# Altium PCB VAMoS PCB.PcbDoc (part 1 of 2)
Units mm, origin at the board's own origin, x right, y up, seen from the top; angles counter-clockwise.
Board outline 104.39 x 129.79 mm, 4 copper layers (Top Layer, Ground Layer, Power Layer, Bottom Layer), stack 0.75 mm thick; 155 components, 106 nets, 508 pads, 201 vias.
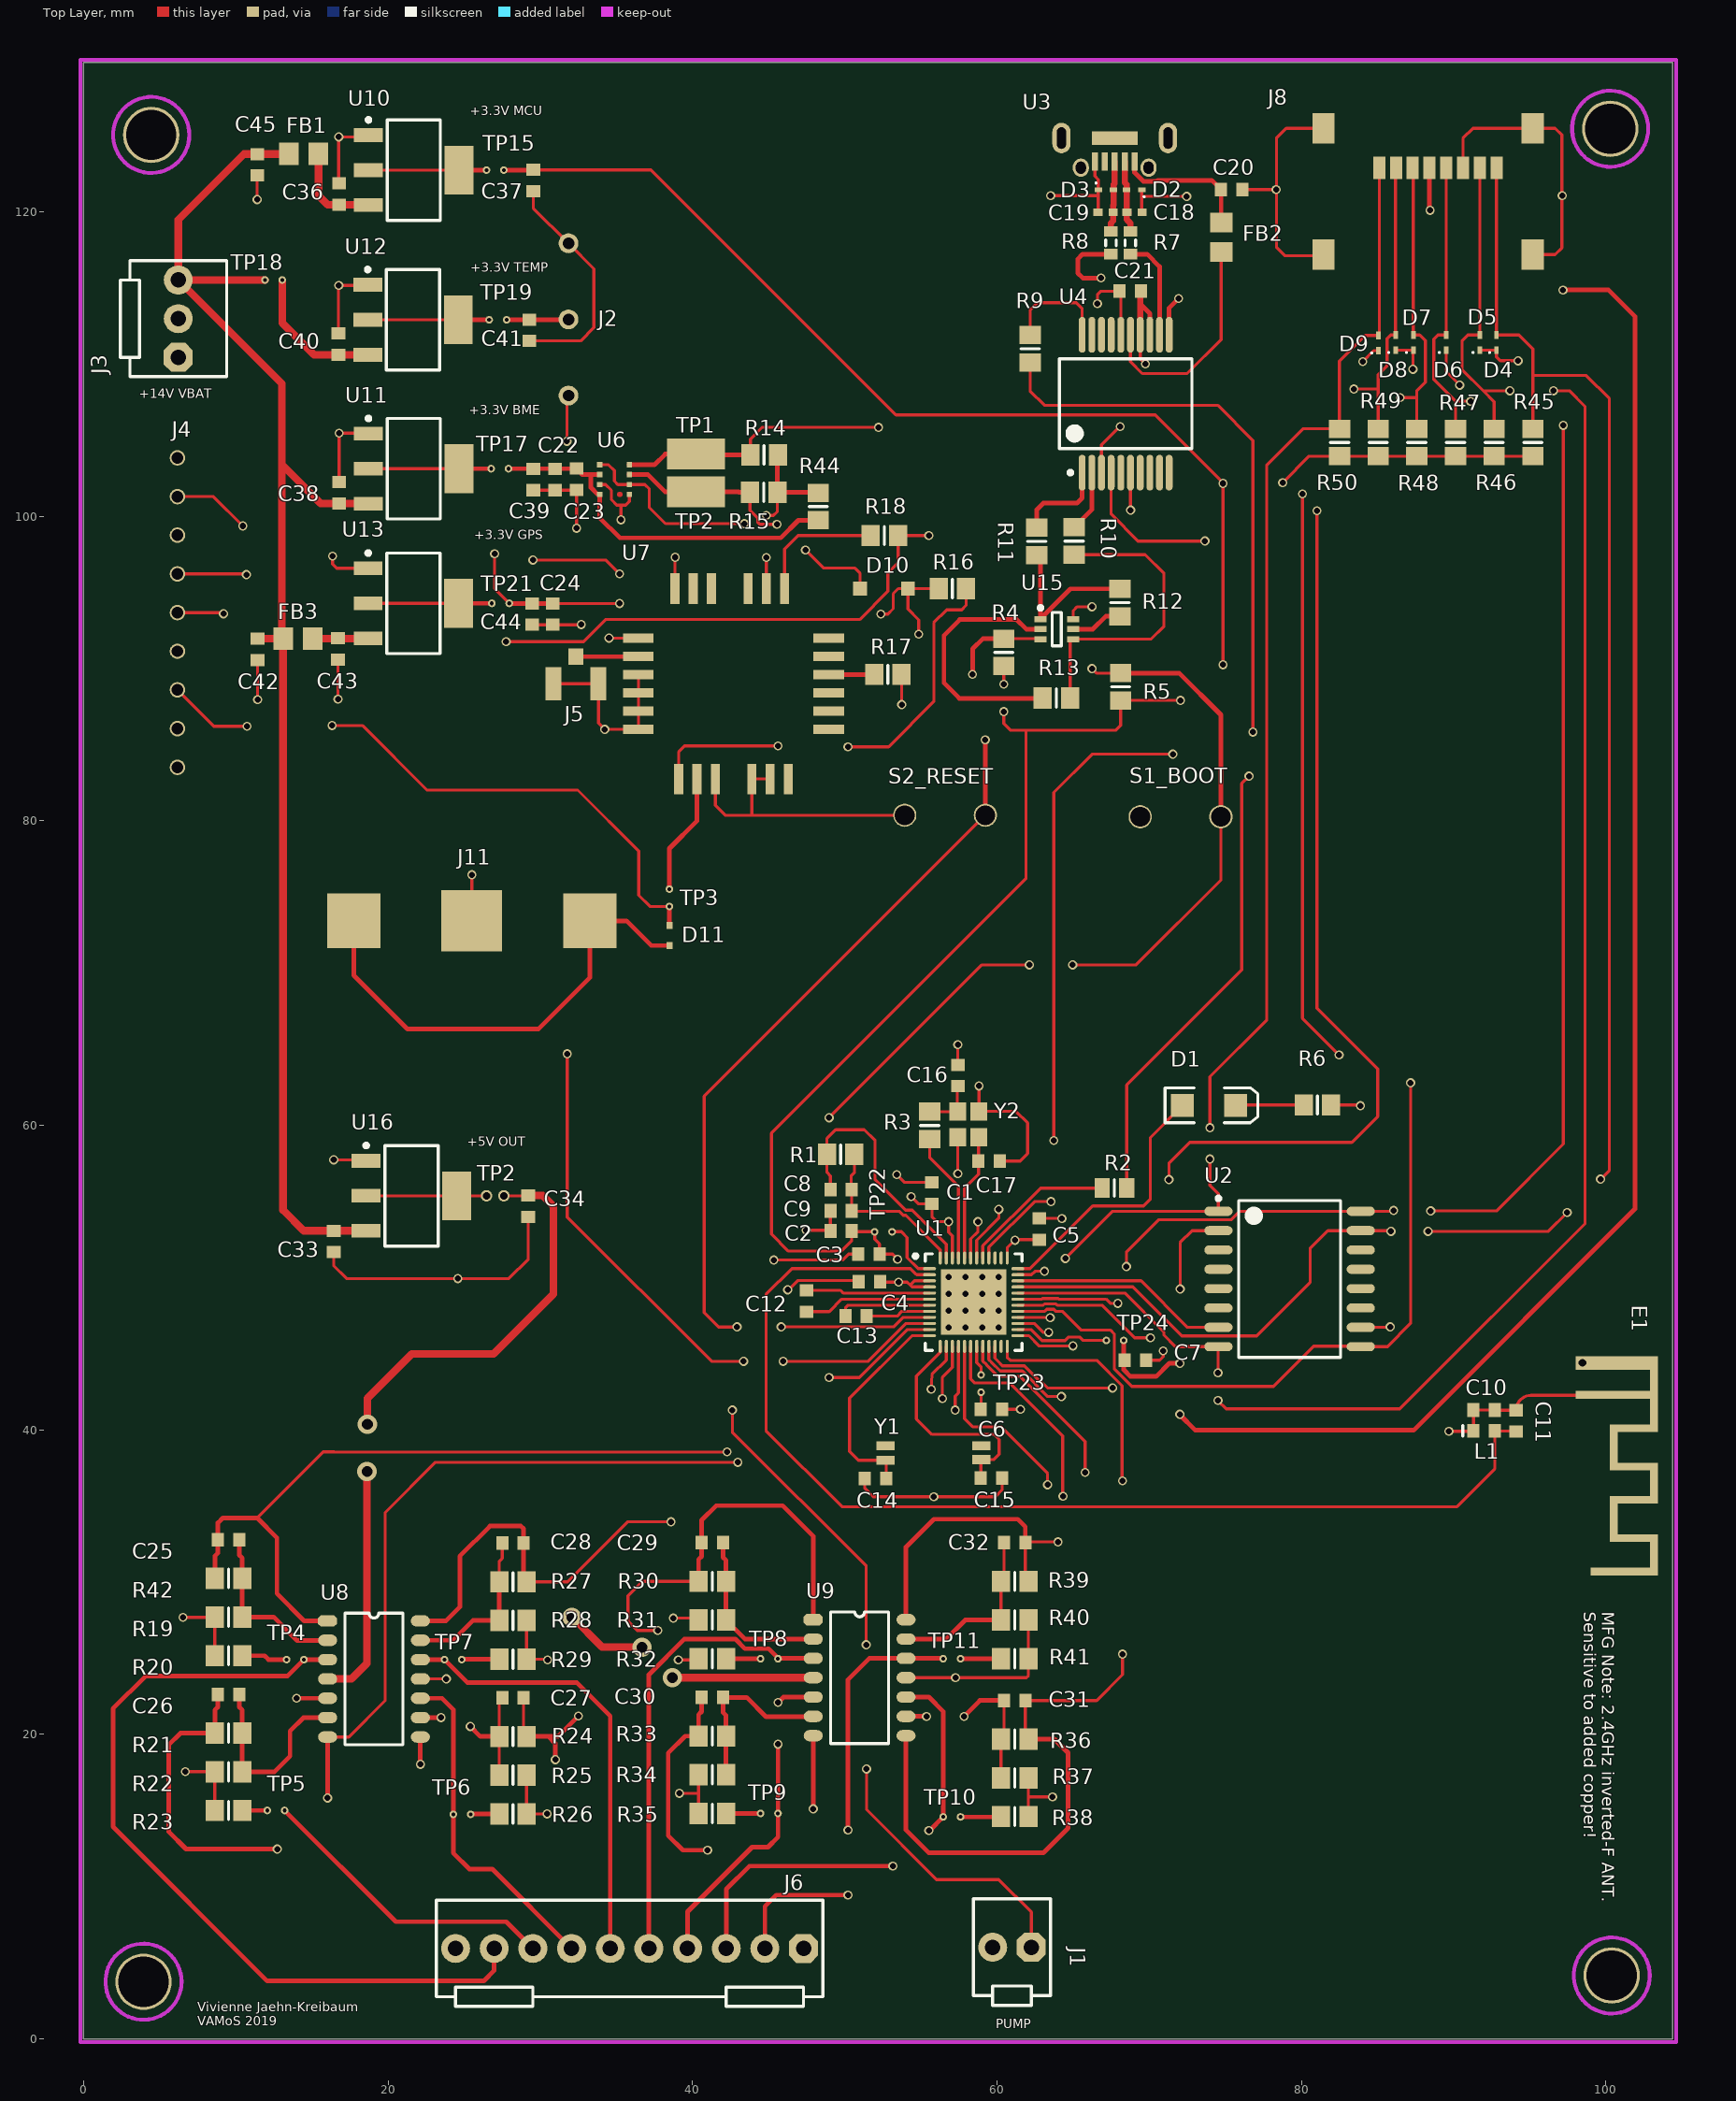
[diagram p0: Top Layer view]
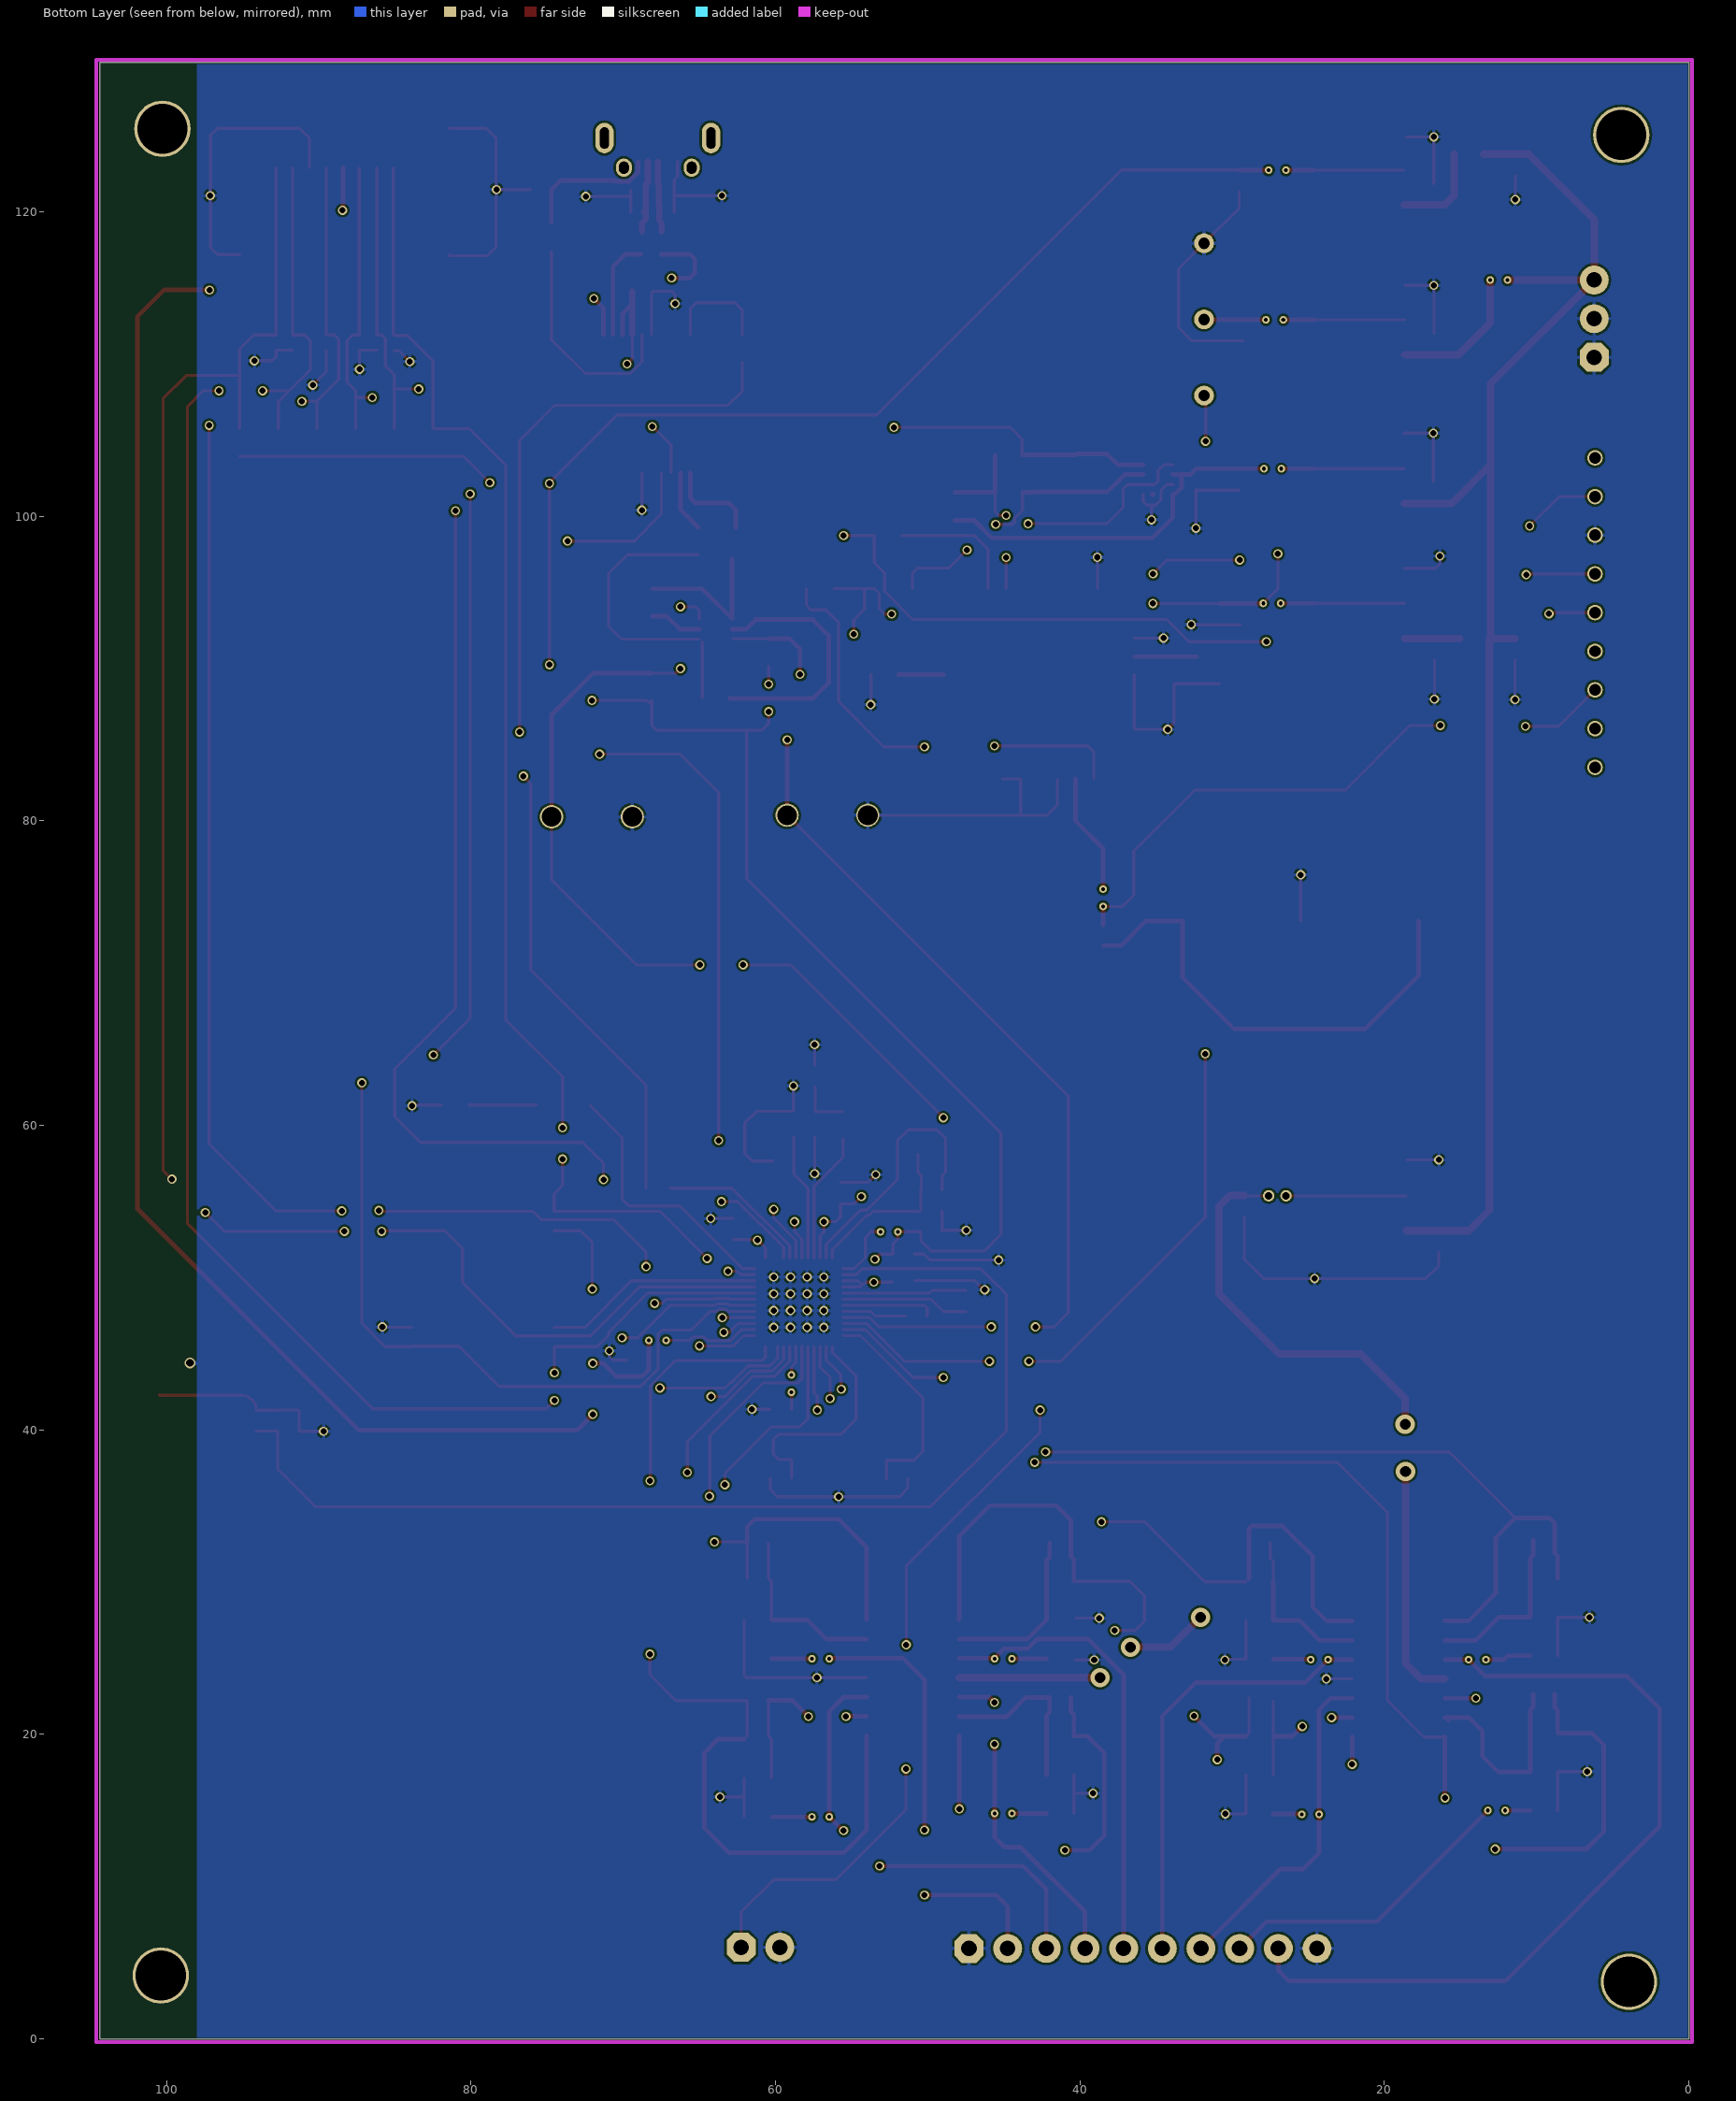
[diagram p1: Bottom Layer view, seen from below]
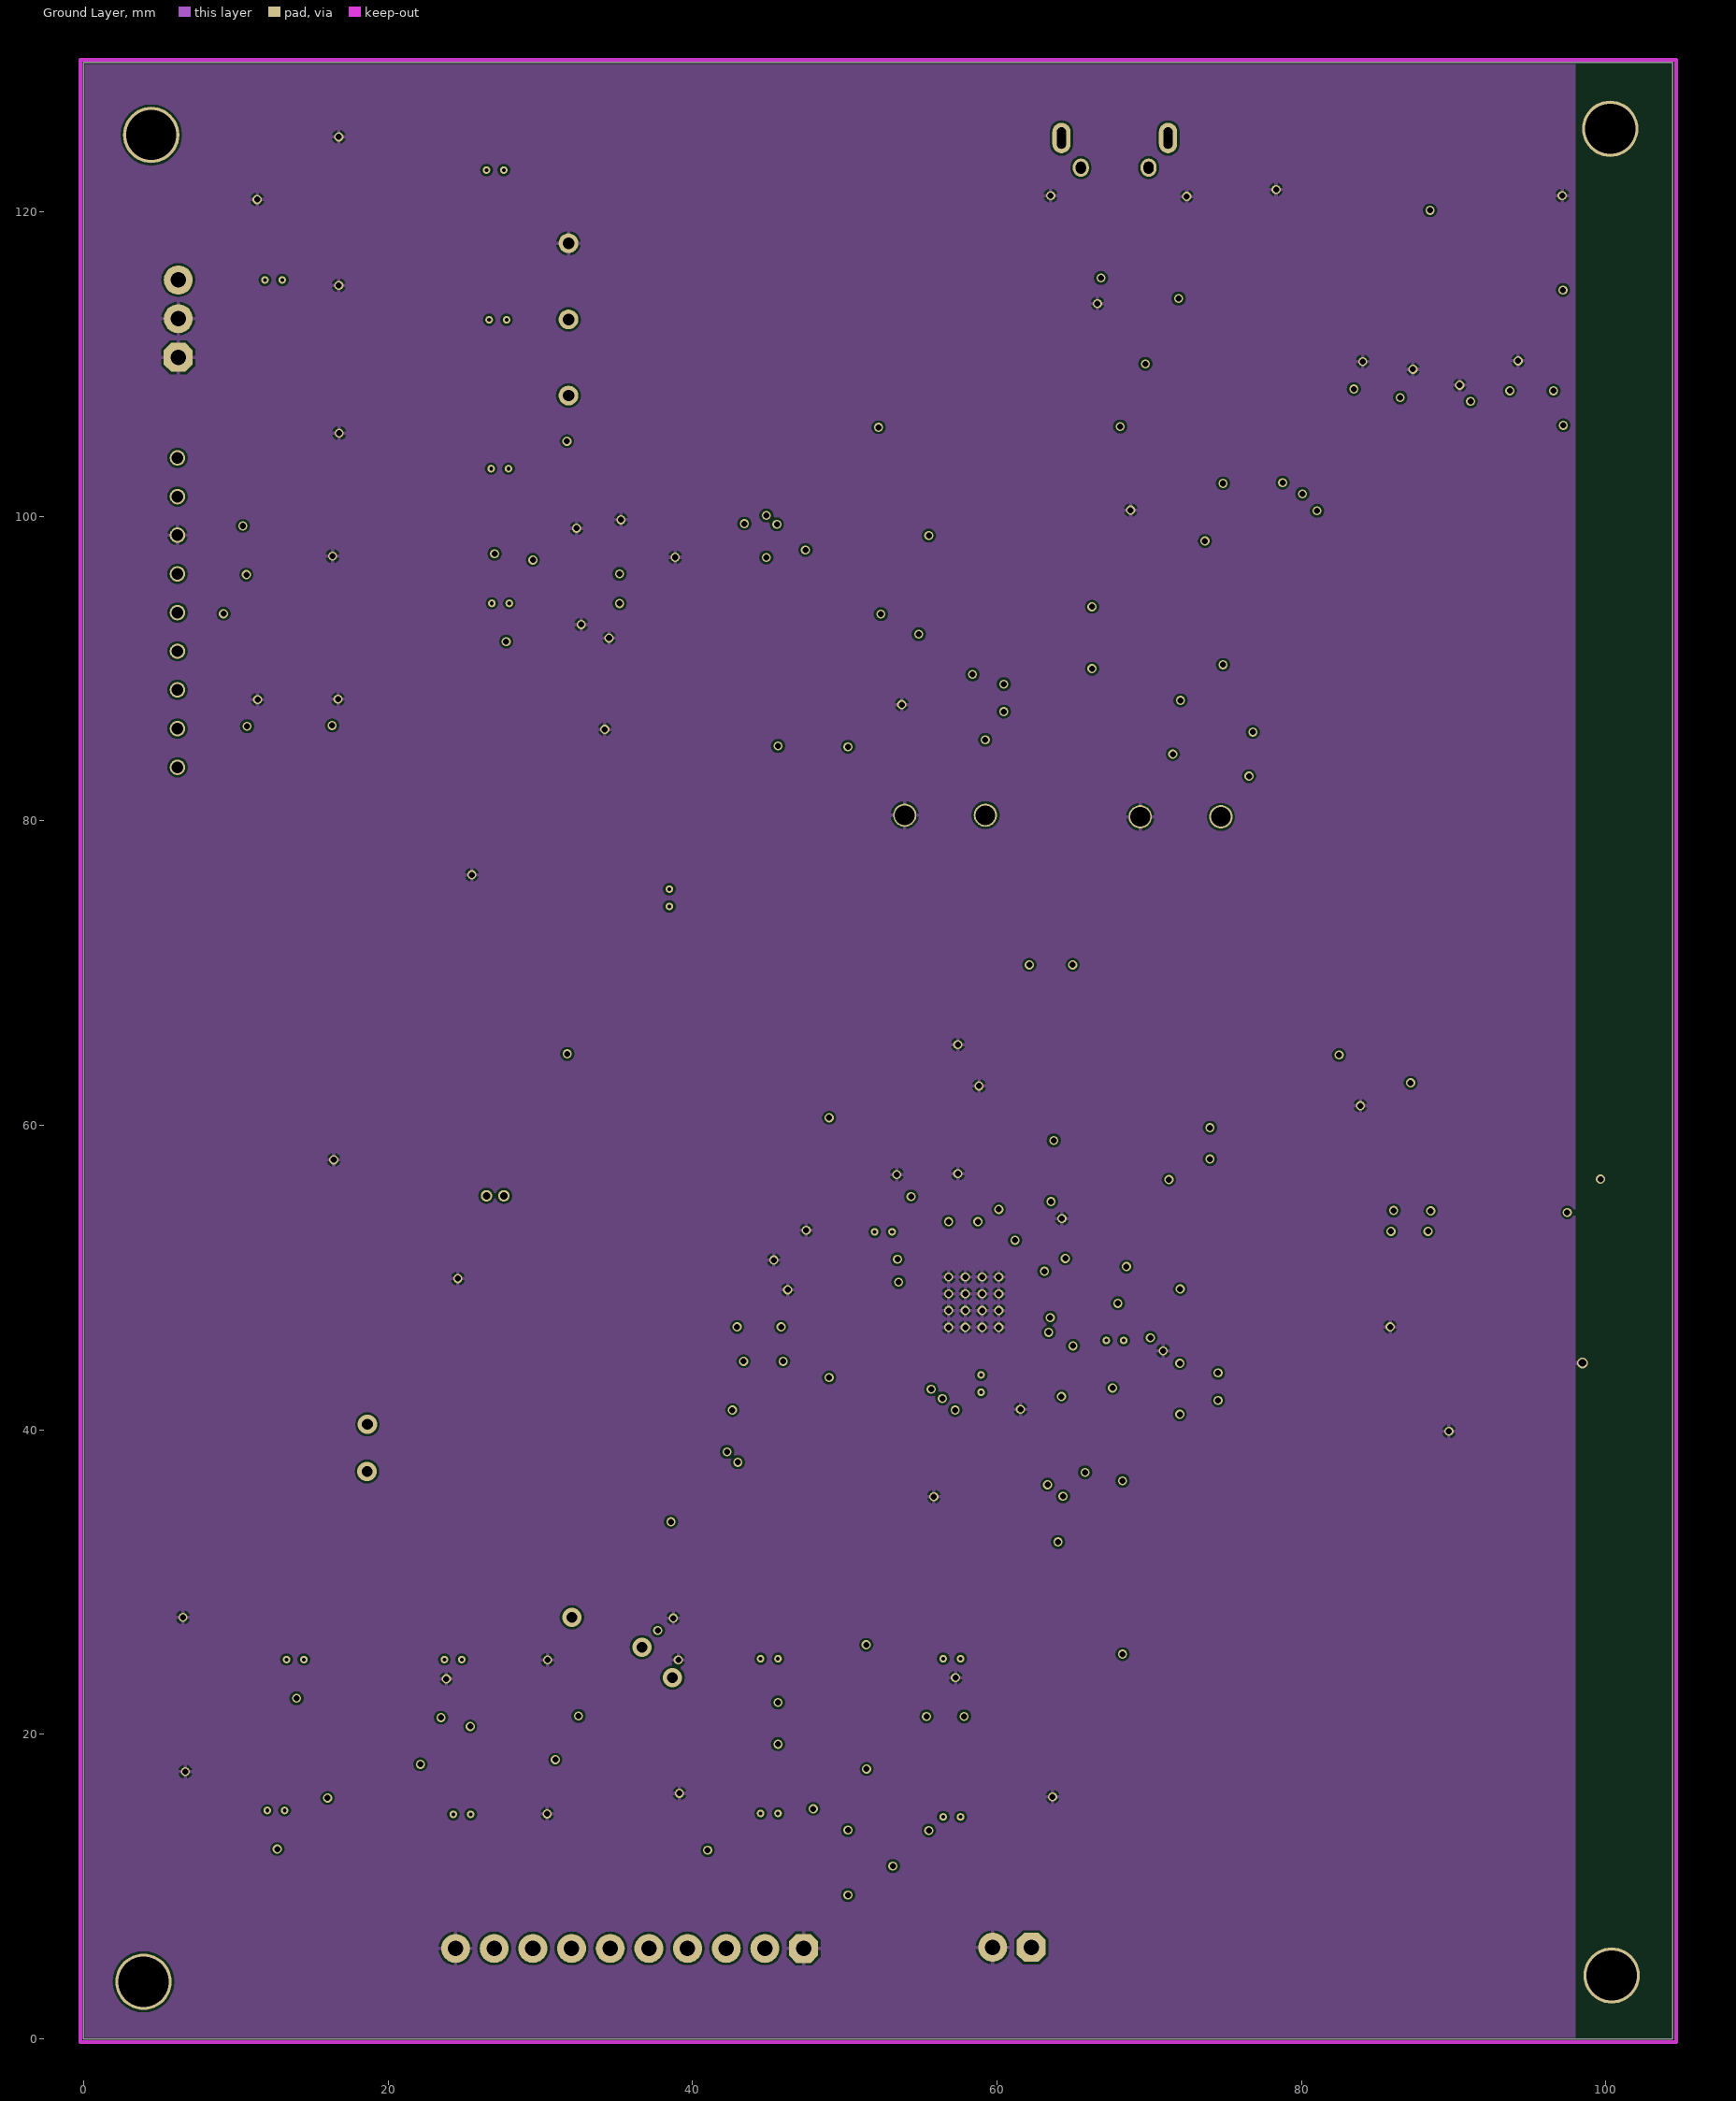
[diagram p2: Ground Layer]
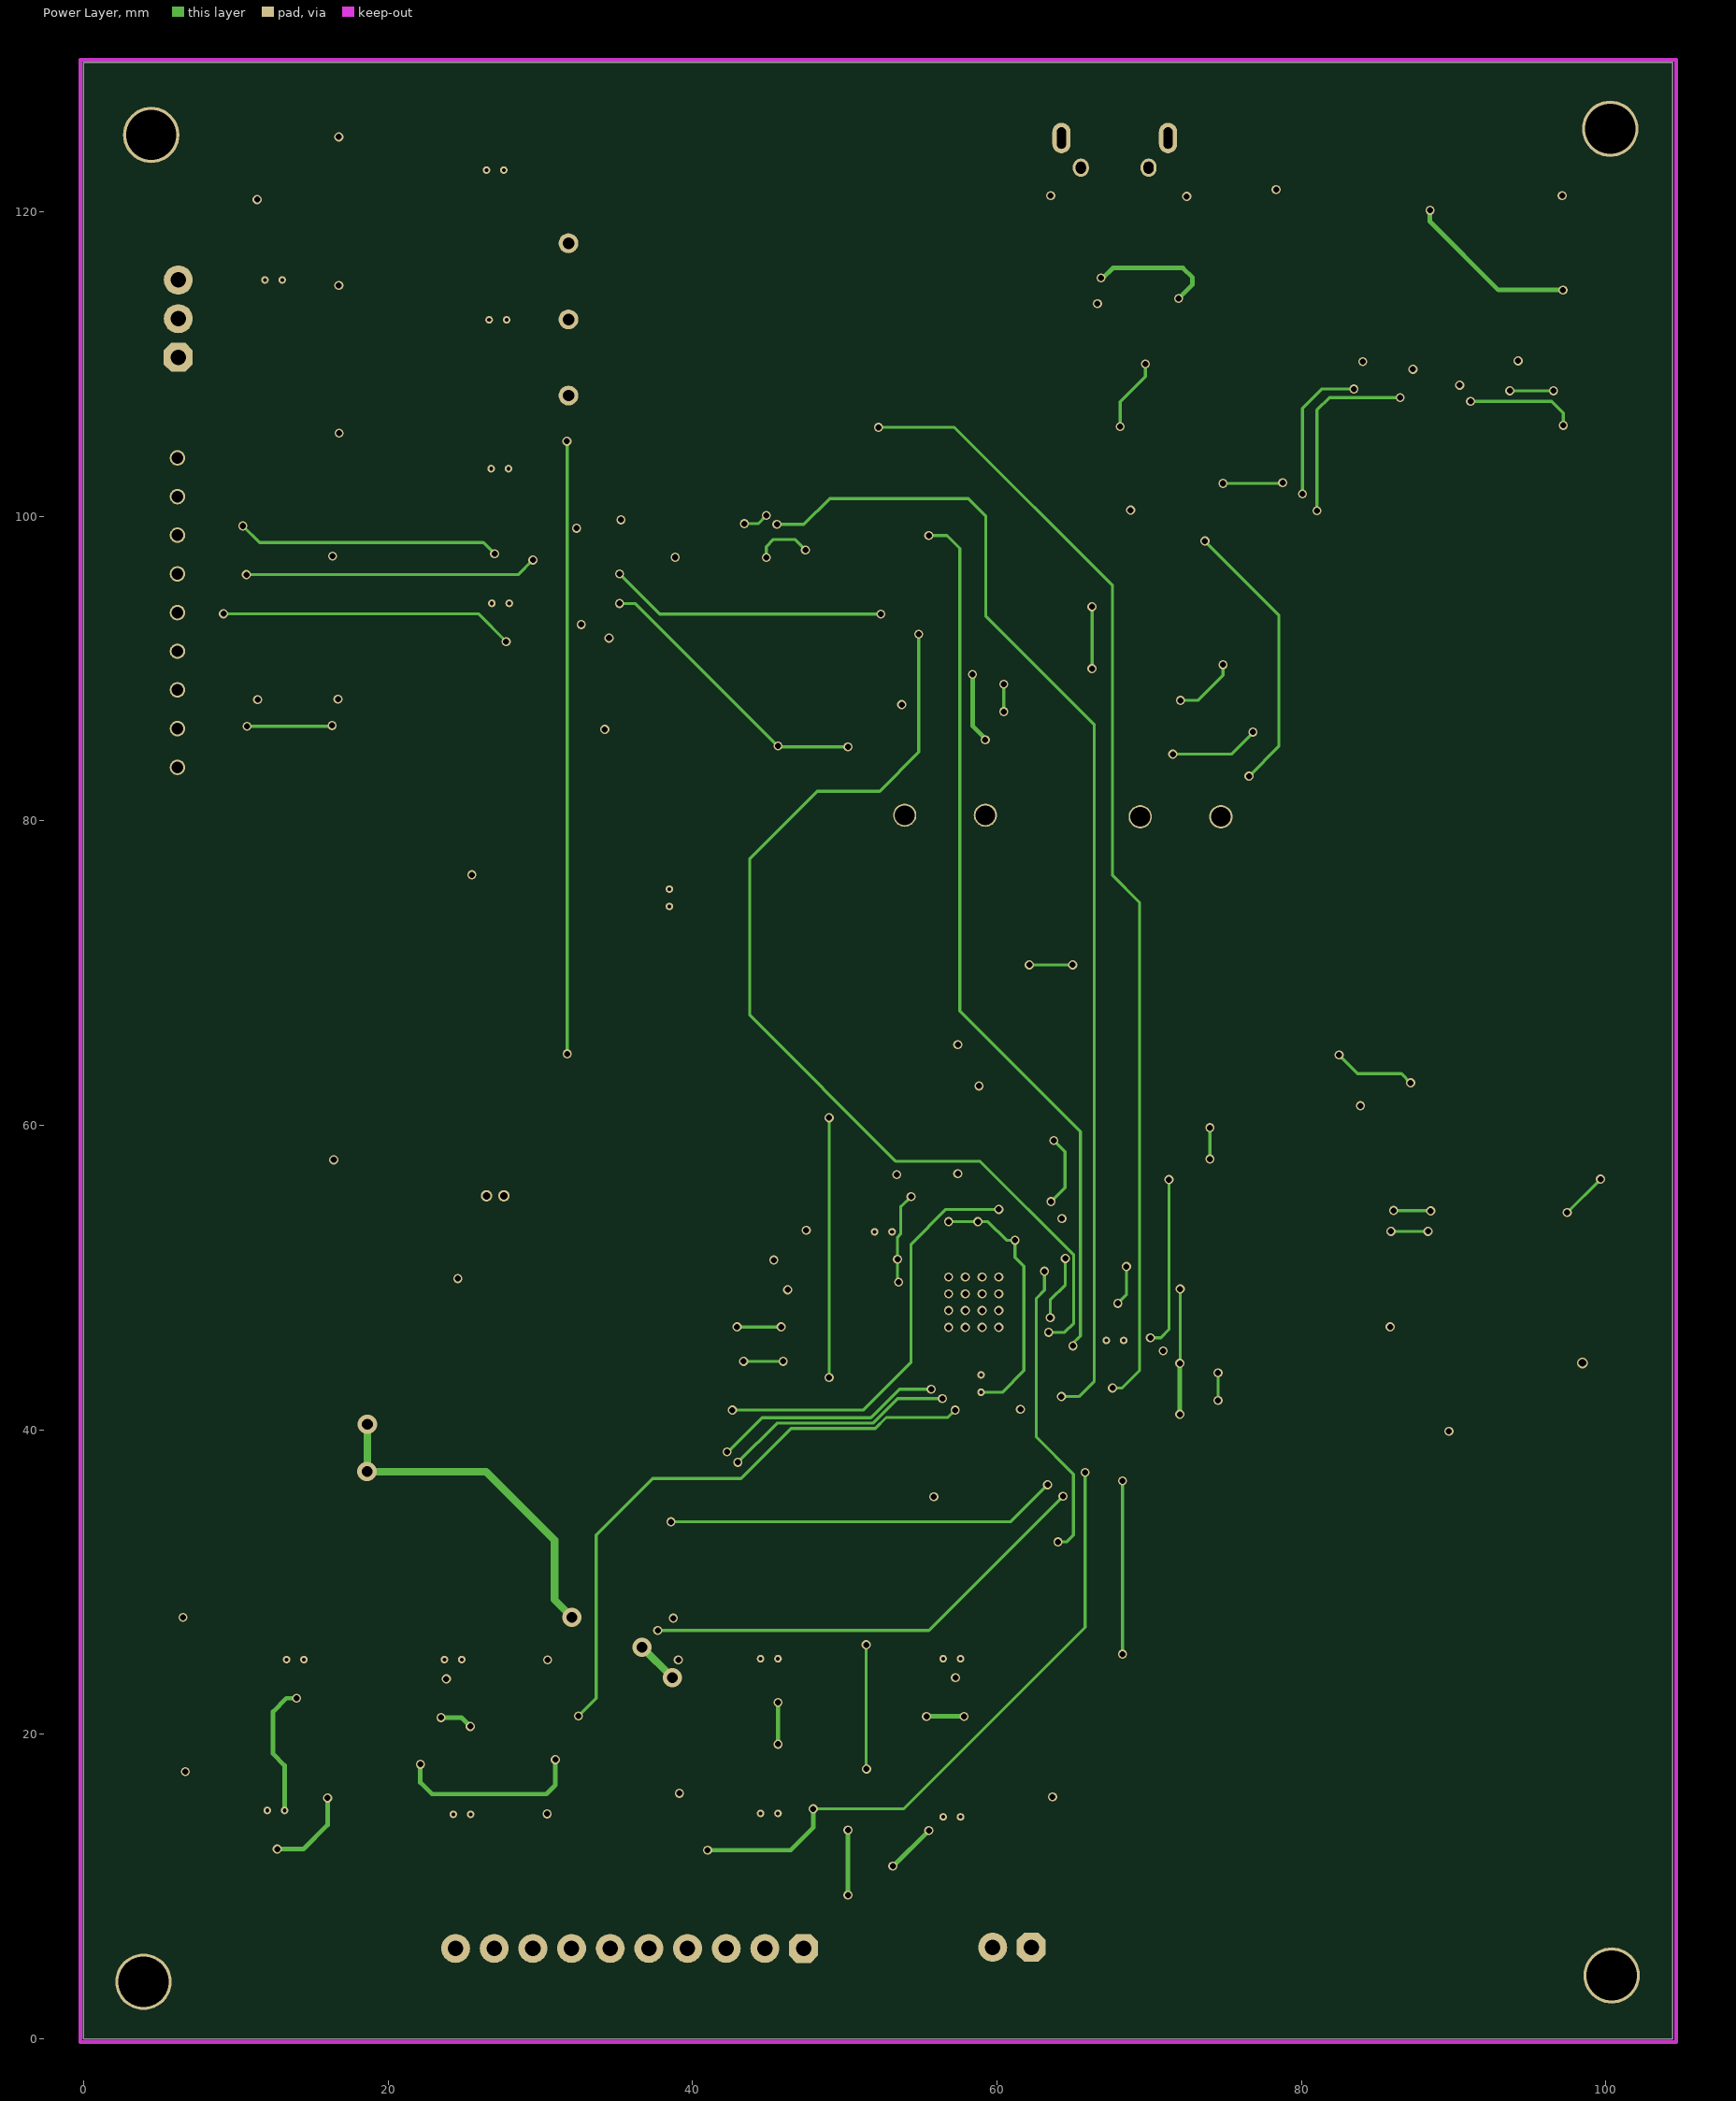
[diagram p3: Power Layer]

## Layer stack, top to bottom
Top Solder: solder mask 0.0102, Solder Resist, Dk 3.5
Top Layer: signal copper 0.035
Dielectric 1: core 0.2, FR-4, Dk 4.2
Ground Layer: signal copper 0.035
Dielectric 3: prepreg 0.21, Dk 4.2
Power Layer: signal copper 0.035
Dielectric 2: core 0.2, FR-4, Dk 4.2
Bottom Layer: signal copper 0.035
Bottom Solder: solder mask 0.0102, Solder Resist, Dk 3.5

## Board outline
0,0 101.6,0 104.394,0 104.394,129.794 0,129.794 0,120.65

## Design rules (kind name [scope] priority, off if disabled: settings)
Clearance [All] p1: gap=0.15
ComponentClearance [All] p1: gap=0.25 collisioncheckmode=3 verticalgap=0.25 showdistances=FALSE
DiffPairsRouting [All] p1: maxlimit=10 minlimit=0.2 mostfreqgap=0.25 toplayer_minwidth=0.2 toplayer_maxwidth=10 toplayer_prefwidth=0.25 midlayer1_minwidth=0.2 midlayer1_maxwidth=10 midlayer1_prefwidth=0.25 midlayer2_minwidth=0.2 midlayer2_maxwidth=10 midlayer2_prefwidth=0.25 bottomlayer_minwidth=0.2 bottomlayer_maxwidth=10 bottomlayer_prefwidth=0.25 maxuncoupledlength=12.7
Height [All] p1: minheight=0 maxheight=100 prefheight=0
HoleSize [All] p1: absolutevalues=TRUE maxlimit=12 minlimit=0.2 maxpercent=80.000 minpercent=20.000
HoleToHoleClearance [All] p1: gap=0.25 allowstackedmicrovias=TRUE
MinimumSolderMaskSliver [All] p1: minsoldermaskwidth=0.05
PlaneClearance [All] p1: clearance=0.5
PlaneConnect [All] p1: planeconnectstyle=Relief reliefexpansion=0.25 reliefentries=4 reliefconductorwidth=0.25 reliefairgap=0.25
PolygonConnect [All] p1: connectstyle=Relief reliefconductorwidth=0.25 reliefentries=4 polygonreliefangle="90 Angle" airgapwidth=0.15
RoutingCorners [All] p1: cornerstyle=45-Degree minsetback=2.5 maxsetback=2.5
RoutingVias [All] p1: holewidth=0.4 width=0.6 viastyle="Through Hole" minholewidth=0.2 minwidth=0.5 maxholewidth=1 maxwidth=1.5
SilkToSilkClearance [All] p1: silktosilkclearance=0.25
SilkToSolderMaskClearance [IsPad] p1: minsilkscreentomaskgap=0.1 clearancetoexposedcopper=TRUE
SolderMaskExpansion [All] p1: expansion=0.1
Width [All] p1: maxlimit=10 minlimit=0.2 preferedwidth=0.3 minimp=50.000000 maximp=50.000000 favimp=50.000000
19 further rules are at their usual default settings.

## Classes and differential pairs
differential pair DIFF90: +DIFF90_P -DIFF90_N

## Components (designator, comment, footprint, x,y, rotation, side; value= is the part's Value field where it differs from the comment)
C1 "Cap" 1608[0603] 55.728,55.55 r270 top
C2 "Cap" 1608[0603] 49.759,53.061 r0 top
C3 "Cap" 1608[0603] 51.587,51.537 r0 top
C4 "Cap" 1608[0603] 51.613,49.733 r0 top
C5 "Cap" 1608[0603] 62.789,53.188 r270 top
C6 "Cap" 1608[0603] 59.639,41.351 r180 top
C7 "Cap" 1608[0603] 69.088,44.577 r180 top
C8 "Cap" 1608[0603] 49.759,55.778 r0 top
C9 "Cap" 1608[0603] 49.759,54.381 r0 top
C10 "Cap" 1608[0603] 91.999,41.3 r0 top
C11 "Cap" 1608[0603] 94.107,40.589 r90 top
C12 "Cap" 1608[0603] 47.498,48.463 r90 top
C13 "Cap" 1608[0603] 50.749,47.473 r0 top
C14 "Cap" 1608[0603] 52.019,36.805 r0 top
C15 "Cap" 1608[0603] 59.639,36.83 r180 top
C16 "Cap" 1608[0603] 57.429,63.271 r90 top
C17 "Cap" 1608[0603] 59.487,57.658 r0 top
C18 "Cap" 0402 69.037,119.964 r180 top
C19 "Cap" 0402 67.132,119.964 r0 top
C20 "Cap" 1608[0603] 75.413,121.463 r180 top
C21 "Cap" 1608[0603] 68.758,114.783 r0 top
C22 "Cap" 1608[0603] 30.963,102.413 r90 top
C23 "Cap" 1608[0603] 32.385,102.438 r90 top
C24 "Cap" 1608[0603] 30.81,93.574 r90 top
C25 "Cap" 1608[0603] 9.525,32.786 r180 top
C26 "Cap" 1608[0603] 9.525,22.626 r180 top
C27 "Cap" 1608[0603] 28.205,22.403 r0 top
C28 "Cap" 1608[0603] 28.205,32.563 r0 top
C29 "Cap" 1608[0603] 41.3,32.589 r180 top
C30 "Cap" 1608[0603] 41.3,22.429 r180 top
C31 "Cap" 1608[0603] 61.163,22.226 r0 top
C32 "Cap" 1608[0603] 61.163,32.589 r0 top
C33 "Cap" 1608[0603] 16.434,52.375 r90 top
C34 "Cap" 1608[0603] 29.21,54.686 r90 top
C36 "Cap" 1608[0603] 16.789,121.158 r270 top
C37 "Cap" 1608[0603] 29.54,122.047 r270 top
C38 "Cap" 1608[0603] 16.789,101.549 r270 top
C39 "Cap" 1608[0603] 29.54,102.413 r270 top
C40 "Cap" 1608[0603] 16.739,111.303 r270 top
C41 "Cap" 1608[0603] 29.286,112.217 r270 top
C42 "Cap" 1608[0603] 11.43,91.262 r90 top
C43 "Cap" 1608[0603] 16.713,91.288 r90 top
C44 "Cap" 1608[0603] 29.464,93.574 r90 top
C45 "Cap" 1608[0603] 11.405,123.088 r90 top
D1 "LED2" 3.2X1.6X1.1 73.939,61.316 r0 top
D2 "ESD7951ST5GOSCT-ND" SODFL100X40-2N 69.012,121.437 r180 top
D3 "ESD7951ST5GOSCT-ND" SODFL100X40-2N 67.158,121.437 r0 top
D4 "ESD7951ST5GOSCT-ND" SODFL100X40-2N 92.812,111.404 r90 top
D5 "ESD7951ST5GOSCT-ND" SODFL100X40-2N 91.719,111.404 r90 top
D6 "ESD7951ST5GOSCT-ND" SODFL100X40-2N 89.51,111.404 r90 top
D7 "ESD7951ST5GOSCT-ND" SODFL100X40-2N 87.351,111.404 r90 top
D8 "ESD7951ST5GOSCT-ND" SODFL100X40-2N 86.182,111.404 r90 top
D9 "ESD7951ST5GOSCT-ND" SODFL100X40-2N 85.065,111.379 r90 top
D10 "1N4148" "SOD-123 1N4148W-7-F" 52.578,95.25 r0 top
D11 "RB521S30T1G" "SOD-523 RB521S30" 38.481,72.466 r270 top
E1 "Antenna" SWRA1117 100.457,44.399 r270 top
FB1 "Ferrite Bead" MI0805K400R-10 13.487,123.8 r270 top
FB2 "Ferrite Bead" MI0805K400R-10 74.727,119.304 r180 top
FB3 "Ferrite Bead" MI0805K400R-10 13.106,91.973 r270 top
J1 "PUMP" 6410/2pin 62.255,6.02 r180 top
J2 "1935174" 1935174 31.852,112.928 r270 top
J3 "VBAT" 6410/3pin 6.223,110.439 r90 top
J4 "PPPC091LFBN-RC" PPPC091LFBN-RC 6.172,93.675 r90 top
J5 "uFl Connector" CONUFL001-SMD-T 32.334,89.256 r180 top
J6 "Header 10H" 6410/10pin 47.295,5.944 r180 top
J8 "microSD" SD-47219-001 88.411,122.885 r180 top
J11 "301 30mm Holder" S8201-46R 25.502,73.431 r0 top
L1 "Inductor" INDC1608L 91.999,39.929 r0 top
R1 "Res1" 6-0805_N 49.733,58.09 r180 top
R2 "Res1" 6-0805_L 67.716,55.88 r0 top
R3 "Res1" 6-0805_N 55.575,59.995 r90 top
R4 "Res1" 6-0805_N 60.452,91.059 r270 top
R5 "Res1" 6-0805_N 68.123,88.798 r270 top
R6 "Res1" 6-0805_N 81.051,61.341 r180 top
R7 "Res1" J1-0603 68.758,117.958 r270 top
R8 "Res1" J1-0603 67.488,117.958 r270 top
R9 "Res1" 6-0805_N 62.179,110.998 r270 top
R10 "Res1" 6-0805_N 65.075,98.374 r270 top
R11 "Res1" 6-0805_N 62.611,98.349 r270 top
R12 "Res1" 6-0805_N 68.072,94.336 r90 top
R13 "Res1" 6-0805_N 63.906,88.062 r180 top
R14 "Res1" 6-0805_N 44.704,104.038 r0 top
R15 "Res1" 6-0805_N 44.679,101.575 r0 top
R16 "Res1" 6-0805_N 57.074,95.25 r0 top
R17 "Res1" 6-0805_N 52.832,89.611 r180 top
R18 "Res1" 6-0805_N 52.603,98.73 r180 top
R19 "Res1" 6-0805_N 9.525,27.706 r0 top
R20 "Res1" 6-0805_N 9.525,25.166 r0 top
R21 "Res1" 6-0805_N 9.525,20.086 r180 top
R22 "Res1" 6-0805_N 9.525,17.546 r0 top
R23 "Res1" 6-0805_N 9.525,15.006 r0 top
R24 "Res1" 6-0805_N 28.205,19.863 r0 top
R25 "Res1" 6-0805_N 28.205,17.323 r180 top
R26 "Res1" 6-0805_N 28.205,14.783 r180 top
R27 "Res1" 6-0805_N 28.205,30.023 r0 top
R28 "Res1" 6-0805_N 28.205,27.483 r180 top
R29 "Res1" 6-0805_N 28.205,24.943 r180 top
R30 "Res1" 6-0805_N 41.3,30.049 r180 top
R31 "Res1" 6-0805_N 41.3,27.509 r0 top
R32 "Res1" 6-0805_N 41.3,24.969 r0 top
R33 "Res1" 6-0805_N 41.3,19.889 r180 top
R34 "Res1" 6-0805_N 41.3,17.349 r0 top
R35 "Res1" 6-0805_N 41.3,14.809 r0 top
R36 "Res1" 6-0805_N 61.163,19.686 r0 top
R37 "Res1" 6-0805_N 61.163,17.146 r180 top
R38 "Res1" 6-0805_N 61.163,14.606 r180 top
R39 "Res1" 6-0805_N 61.163,30.049 r0 top
R40 "Res1" 6-0805_N 61.163,27.509 r180 top
R41 "Res1" 6-0805_N 61.163,24.969 r180 top
R42 "Res1" 6-0805_N 9.525,30.246 r180 top
R44 "Res1" 6-0805_N 48.26,100.635 r270 top
R45 "Res1" 6-0805_N 95.199,104.845 r270 top
R46 "Res1" 6-0805_N 92.659,104.845 r270 top
R47 "Res1" 6-0805_N 90.119,104.845 r270 top
R48 "Res1" 6-0805_N 87.579,104.845 r270 top
R49 "Res1" 6-0805_N 85.039,104.845 r270 top
R50 "Res1" 6-0805_N 82.499,104.845 r270 top
S1_BOOT "BTN-0" GPTS203211B 72.06,80.264 r90 top (schematic designator S1)
S2_RESET "RESET" GPTS203211B 56.591,80.366 r90 top (schematic designator S2)
TP1 "SMD Compact Test Point" "5029 Test Point" 40.234,104.089 r0 top
TP2 "Hook Type Test Point" 36-500x-ND#1 26.467,55.372 r0 top
TP2 "SMD Compact Test Point" "5029 Test Point" 40.234,101.6 r0 top
TP3 "Hook Type Test Point" 36-500x-ND#2 38.481,75.514 r270 top
TP4 "Hook Type Test Point" 36-500x-ND#2 13.335,24.917 r0 top
TP5 "Hook Type Test Point" 36-500x-ND#2 12.065,15.006 r0 top
TP6 "Hook Type Test Point" 36-500x-ND#2 25.425,14.752 r180 top
TP7 "Hook Type Test Point" 36-500x-ND#2 24.841,24.917 r180 top
TP8 "Hook Type Test Point" 36-500x-ND#2 44.475,24.969 r0 top
TP9 "Hook Type Test Point" 36-500x-ND#2 44.475,14.809 r0 top
TP10 "Hook Type Test Point" 36-500x-ND#2 57.607,14.58 r180 top
TP11 "Hook Type Test Point" 36-500x-ND#2 57.607,24.969 r180 top
TP15 "Hook Type Test Point" 36-500x-ND#2 26.467,122.733 r0 top
TP17 "Hook Type Test Point" 36-500x-ND#2 26.772,103.124 r0 top
TP18 "Hook Type Test Point" 36-500x-ND#2 11.913,115.519 r0 top
TP19 "Hook Type Test Point" 36-500x-ND#2 26.645,112.903 r0 top
TP21 "Hook Type Test Point" 36-500x-ND#2 26.822,94.285 r0 top
TP22 "Hook Type Test Point" 36-500x-ND#2 51.968,53.01 r0 top
TP23 "Hook Type Test Point" 36-500x-ND#2 58.953,42.469 r90 top
TP24 "Hook Type Test Point" 36-500x-ND#2 67.183,45.872 r0 top
U1 "ESP32D0WDQ6" QFN40P600X600X90_HS-49N 58.471,48.387 r0 top
U2 "S25FL128S" SOIC127P1030X265-16N 79.223,49.911 r0 top
U3 "UJ2-MIBH2-4" UJ2-MIBH2-4-SMT 69.037,123.292 r270 top
U4 "FT231XS" SOP64P1030X175-20N 68.453,107.391 r90 top
U6 "BME280" LGA8C65P4X4_250X250X100 34.874,102.413 r270 top
U7 "XA1100" XA1100 42.697,89.002 r0 top
U8 "LM660" SOIC-14 19.075,23.642 r0 top
U9 "LM660" SOIC-14 50.978,23.724 r0 top
U10 "ZLDO1117" SOT230P700X165-4N 21.692,122.733 r0 top
U11 "ZLDO1117" SOT230P700X165-4N 21.692,103.124 r0 top
U12 "ZLDO1117" SOT230P700X165-4N 21.641,112.903 r0 top
U13 "ZLDO1117" SOT230P700X165-4N 21.666,94.285 r0 top
U15 "MBT3904DW1T1G" SOT65P210X110-6N 63.932,92.583 r0 top
U16 "ZLDO1117" SOT230P700X165-4N 21.539,55.372 r0 top
Y1 "MC-146 32.768KA-AC3" MC-146 55.829,38.506 r0 top
Y2 "FA-20H" FA-20H 58.115,60.071 r270 top

## Footprints (in the part's own frame and the unit in brackets; to place one, negate y for a bottom-side part, rotate by r counter-clockwise, add the part's x,y. Pads: shape width x height; smd on the part's side, far side on the other; paste and mask are expansions set on the pad)
3.2X1.6X1.1 [mm] "SMT LED; 2 Flat Leads"
  rect 1.5x1.5 smd: 1(-1.75,0) 2(1.75,0)
  silkscreen extent -2.9,-1.15 3.2,1.15
6-0805_L [mm] "Chip Resistor, Body 2.0x1.2mm, IPC High Density"
  rect 1x1.3 smd: 1(-0.8,0) 2(0.8,0)
  silkscreen extent 0,-0.55 0,0.55, body extent -1.07,-0.7 1.07,0.7, height 0.7
6-0805_N [mm] "Chip Resistor, Body 2.0x1.2mm, IPC Medium Density"
  rect 1.2x1.4 smd: 1(-0.9,0) 2(0.9,0)
  silkscreen extent 0,-0.6 0,0.6, body extent -1.07,-0.7 1.07,0.7, height 0.7
36-500x-ND#1 [mm] "Hook Type Test Point"
  round 0.75 hole 0.5: 1(0,0) 2(1.14,0)
36-500x-ND#2 [mm] "Hook Type Test Point"
  round 0.5 hole 0.25: 1(0,0) 2(1.14,0)
0402 [mm] "Chip Capacitor, Body 1.0x0.5mm, IPC High Density"
  rect 0.6x0.5 smd: 1(-0.5,0) 2(0.5,0)
  body extent -0.55,-0.3 0.55,0.3, height 1.3
1608[0603] [mm] "Chip Capacitor, Body 1.6x0.8mm, IPC High Density"
  rect 0.8x0.9 smd: 1(-0.7,0) 2(0.7,0)
  body extent -0.87,-0.48 0.87,0.48, height 1.3
"5029 Test Point" [mm] "Compact SM Test Point"
  rect 3.8x2.03 smd: 1(0,0)
6410/2pin [mil]
  oct 75x75 hole 40: 1(0,0)
  round 75 hole 40: 2(100,0)
  silkscreen extent -50,-125 150,150, body extent -50,-114 150,114, height 461
6410/3pin [mil] "3-pin Power Connector"
  oct 75x75 hole 40: 1(0,0)
  round 75 hole 40: 2(100,0) 3(200,0)
  silkscreen extent -50,-125 250,150, body extent -50,-114 250,114, height 461
6410/10pin [mil] "10-pin J4 Analog Input Connector"
  oct 75x75 hole 40: 1(0,0)
  round 75 hole 40: 2(100,0) 3(200,0) 4(300,0) 5(400,0) 6(500,0) 7(600,0) 8(700,0) 9(800,0) 10(900,0)
  silkscreen extent -50,-125 950,150, body extent -50,-114 950,114, height 461
1935174 [mm] "3-pin 5mm Terminal Block"
  round 1.3 hole 0.762: 1(-5,0) 2(0,0) 3(5,0)
CONUFL001-SMD-T [mm] "uFL Connector"
  rect 1.05x2.2 smd: GND(-1.475,0.25) GND(1.475,0.25)
  rect 1x1.05 smd: SIG(0,-1.525)
  body extent -1.5,-1.55 1.5,1.55, height 1.25
FA-20H [mm] "40MHz Crystal"
  rect 1.2x1.1 smd: 1(-0.85,-0.7) 2(0.85,-0.7) 3(0.85,0.7) 4(-0.85,0.7)
GPTS203211B [mm] "SPST Push Button Switch"
  round 1.524 hole 1.3: 1(0,2.65) 2(0,-2.65)
  body extent -13,-6.5 0,6.5, height 9.1
INDC1608L [mm] "Chip Inductor, Body 1.6x0.8mm, IPC High Density"
  rect 0.8x0.9 smd: 1(-0.7,0) 2(0.7,0)
  silkscreen extent -1.4,-0.35 -1.4,0.35, body extent -0.87,-0.48 0.87,0.48, height 0.55
J1-0603 [mm] "Chip Resistor, Body 1.6x0.8mm, IPC High Density"
  rect 0.7x0.9 smd: 1(-0.75,0) 2(0.75,0)
  silkscreen extent -0.2,-0.35 0.2,0.35, body extent -0.85,-0.48 0.85,0.48, height 0.9
LGA8C65P4X4_250X250X100 [mm] "LGA, 8-Leads, Body 2.50x2.50mmx1.00mm, Pitch 0.65mm"
  rect 0.35x0.35 smd: 1(0.975,0.975) 2(0.325,0.975) 3(-0.325,0.975) 4(-0.975,0.975) 5(-0.975,-0.975) 6(-0.325,-0.975) 7(0.325,-0.975) 8(0.975,-0.975)
  Top Layer circle w0.2: c0.975,0.35 r0.08
  body extent -1.25,-1.25 1.25,1.25, height 1
MC-146 [mm] "32.768 kHz Crystal"
  rect 1.2x0.6 smd: 1(-3.15,-0.5) 2(3.15,-0.45) 3(3.15,0.45) 4(-3.15,0.45)
MI0805K400R-10 [mm] "Ferrite Bead"
  rect 1.47x1.285 smd: 1(0,0) 2(0,1.945)
PPPC091LFBN-RC [mm] "9-pin 0.100\" Female Header"
  round 1.02 hole 0.762: 1(-10.16,0) 2(-7.62,0) 3(-5.08,0) 4(-2.54,0) 5(0,0) 6(2.54,0) 7(5.08,0) 8(7.62,0) 9(10.16,0)
  body extent -12,-1.25 12,1.25, height 8.5
QFN40P600X600X90_HS-49N [mm] "QFN, 48-Leads, Body 6.00x6.00mm, Pitch 0.40mm, Thermal Pad 4.30x4.30mm, IPC Medium Density"
  oval 0.85x0.2 smd: 1(-2.9,2.2) 2(-2.9,1.8) 3(-2.9,1.4) 4(-2.9,1) 5(-2.9,0.6) 6(-2.9,0.2) 7(-2.9,-0.2) 8(-2.9,-0.6) 9(-2.9,-1) 10(-2.9,-1.4) 11(-2.9,-1.8) 12(-2.9,-2.2) 25(2.9,-2.2) 26(2.9,-1.8) 27(2.9,-1.4) 28(2.9,-1) 29(2.9,-0.6) 30(2.9,-0.2) 31(2.9,0.2) 32(2.9,0.6) 33(2.9,1) 34(2.9,1.4) 35(2.9,1.8) 36(2.9,2.2)
  oval 0.2x0.85 smd: 13(-2.2,-2.9) 14(-1.8,-2.9) 15(-1.4,-2.9) 16(-1,-2.9) 17(-0.6,-2.9) 18(-0.2,-2.9) 19(0.2,-2.9) 20(0.6,-2.9) 21(1,-2.9) 22(1.4,-2.9) 23(1.8,-2.9) 24(2.2,-2.9) 37(2.2,2.9) 38(1.8,2.9) 39(1.4,2.9) 40(1,2.9) 41(0.6,2.9) 42(0.2,2.9) 43(-0.2,2.9) 44(-0.6,2.9) 45(-1,2.9) 46(-1.4,2.9) 47(-1.8,2.9) 48(-2.2,2.9)
  rect 4.3x4.3 smd: 49(0,0)
  silkscreen extent -3.95,-3.17 3.17,3.17, body extent -3.03,-3.03 3.03,3.03, height 0.9
S8201-46R [mm] "12.5mm Coin Cell Holder"
  rect 3.5x3.6 smd: 1(-7.75,0) 1(7.75,0)
  rect 4x4 smd: 2(0,0)
  Mechanical 15 keep-out circle w0.254: c0,0 r6
SD-47219-001 [mm] "Molex microSD Card Holder"
  rect 0.8x1.5 smd: 1(3.3,0) 2(2.2,0) 3(1.1,0) 4(0,0) 5(-1.1,0) 6(-2.2,0) 7(-3.3,0) 8(-4.4,0)
  rect 1.45x2 smd: 9(-6.78,-2.6) 10(-6.78,5.7) 11(6.97,5.7) 12(6.97,-2.6)
  body extent -7.05,-5.6 7.55,8.9, height 1.06
"SOD-123 1N4148W-7-F" [mm] "2-leads, Standard Diode"
  rect 0.9x0.95 smd: 1(-1.575,0) 2(1.575,0)
"SOD-523 RB521S30" [mm] "2-leads"
  rect 0.48x0.4 smd: 1(-0.66,0) 2(0.66,0)
SODFL100X40-2N [mm] "SODFL, 2-Leads, Body 0.60x1.00mm, IPC Medium Density"
  rect 0.5x0.3 smd: 1(-0.5,0) 2(0.5,0)
  silkscreen extent -0.7,0.4 -0.6,0.5, body extent -0.42,-0.33 0.43,0.33, height 0.4
SOIC127P1030X265-16N [mm] "SOIC, 16-Leads, Body 10.30x7.50mm, Pitch 1.27mm, IPC Medium Density"
  oval 1.85x0.6 smd: 1(-4.675,4.445) 2(-4.675,3.175) 3(-4.675,1.905) 4(-4.675,0.635) 5(-4.675,-0.635) 6(-4.675,-1.905) 7(-4.675,-3.175) 8(-4.675,-4.445) 9(4.675,-4.445) 10(4.675,-3.175) 11(4.675,-1.905) 12(4.675,-0.635) 13(4.675,0.635) 14(4.675,1.905) 15(4.675,3.175) 16(4.675,4.445)
  silkscreen extent -4.8,-5.15 3.35,5.42, body extent -5.15,-5.15 5.15,5.15, height 2.65
SOIC-14 [mm]
  oct 1.25x0.75 smd: 1(-3.048,3.81)
  oval 1.25x0.75 smd: 2(-3.048,2.54) 3(-3.048,1.27) 4(-3.048,0) 5(-3.048,-1.27) 6(-3.048,-2.54) 7(-3.048,-3.81) 8(3.048,-3.81) 9(3.048,-2.54) 10(3.048,-1.27) 11(3.048,0) 12(3.048,1.27) 13(3.048,2.54) 14(3.048,3.81)
  silkscreen extent -1.91,-4.32 1.91,4.32, body extent -3.17,-4.32 3.17,4.32, height 1.52
SOP64P1030X175-20N [mm] "SOP, 20-Leads, Body 8.65x3.90mm, Pitch 0.64mm, IPC Medium Density"
  oval 2.35x0.45 smd: 1(-4.525,2.857) 2(-4.525,2.222) 3(-4.525,1.587) 4(-4.525,0.952) 5(-4.525,0.317) 6(-4.525,-0.318) 7(-4.525,-0.953) 8(-4.525,-1.588) 9(-4.525,-2.223) 10(-4.525,-2.858) 11(4.525,-2.857) 12(4.525,-2.222) 13(4.525,-1.587) 14(4.525,-0.952) 15(4.525,-0.317) 16(4.525,0.318) 17(4.525,0.953) 18(4.525,1.588) 19(4.525,2.223) 20(4.525,2.858)
  silkscreen extent -4.65,-4.35 2.95,4.35, body extent -5.15,-4.35 5.15,4.35, height 1.75
SOT65P210X110-6N [mm] "SOT23, 6-Leads, Body 2.00x2.10mm, Pitch 0.65mm, IPC Medium Density"
  rect 0.8x0.4 smd: 1(-1.075,0.65) 2(-1.075,0) 3(-1.075,-0.65) 4(1.075,-0.65) 5(1.075,0) 6(1.075,0.65)
  silkscreen extent -1.2,-1.1 0.3,1.52, body extent -1.1,-1.1 1.1,1.1, height 1.1
SOT230P700X165-4N [mm] "SOT223, 4-Leads, Body 6.50x7.00mm (avg), Pitch 2.30mm, IPC Medium Density"
  rect 1.9x0.9 smd: 1(-2.975,2.3) 2(-2.975,0) 3(-2.975,-2.3)
  rect 1.9x3.2 smd: 2(2.975,0)
  silkscreen extent -3.1,-3.3 1.75,3.42, body extent -3.5,-3.27 3.5,3.27, height 1.65
SWRA1117 [mm]
  rect 0.9x4.9 smd: 1(0,0)
  rect 5x0.5 smd: 1(2.05,2.7)
  rect 0.5x4.9 smd: 1(2.1,0)
  rect 0.5x2.64 smd: 1(4.3,1.13) 1(6.8,1.13) 1(9,1.13) 1(11.5,1.13)
  rect 2x0.5 smd: 1(5.55,0.06) 1(10.25,0.06)
  rect 2.7x0.5 smd: 1(7.9,2.7) 1(12.6,2.7)
  rect 0.5x3.94 smd: 1(13.7,0.5)
UJ2-MIBH2-4-SMT [mm] "USB MICRO-B Jack"
  oval 2x1.2 hole 0.6 slot 1.4 at 0 deg: 0(-1.55,2.2) 0(-1.55,-4.8)
  oval 1.2x1.05 hole 0.65 slot 0.8 at 0 deg: 0(0.4,0.925) 0(0.4,-3.525)
  rect 1.2x0.4 smd: 1(0,0) 2(0,-0.65) 3(0,-1.3) 4(0,-1.95) 5(0,-2.6)
  rect 0.9x3 smd: 9(-1.55,-1.3)
  body extent -4.75,-5 0.55,2.5, height 0.81
XA1100 [mm] "GPS Module"
  rect 2x0.6 smd: 1(-6.25,3) 2(-6.25,1.8) 3(-6.25,0.6) 4(-6.25,-0.6) 5(-6.25,-1.8) 6(-6.25,-3) 13(6.25,-3) 14(6.25,-1.8) 15(6.25,-0.6) 16(6.25,0.6) 17(6.25,1.8) 18(6.25,3)
  rect 0.6x2 smd: 7(-3.6,-6.25) 8(-2.4,-6.25) 9(-1.2,-6.25) 10(1.2,-6.25) 11(2.4,-6.25) 12(3.6,-6.25) 19(3.35,6.25) 20(2.15,6.25) 21(0.95,6.25) 22(-1.45,6.25) 23(-2.65,6.25) 24(-3.85,6.25)
  body extent -6.25,-6.25 6.25,6.25, height 7

## Part data
C1 C2 C3 C4 C5 C6 C7 C8 C9 C10 C11 C12 C13 C14 C15 C16 C17 C18 C19 C20 C21 C22 C23 C24 C25 C26 C27 C28 C29 C30 C31 C32 C33 C34 C36 C37 C38 C39 C40 C41 C42 C43 C44 C45: "Capacitor"
D1: "Typical RED, GREEN, YELLOW, AMBER GaAs LED"
D2 D3 D4 D5 D6 D7 D8 D9: library part ESD7951S, "TVS Diode"
D10: library part "Diode 1N4148", "High Conductance Fast Diode"
D11: library part "RB521S30T1G Shottky Diode", "RB521S30T1G Shottky Diode"
E1: "Generic Antenna"
FB1 FB2 FB3: "MI0805K400R-10"
J1: library part CON2, "Connector 2 pin"
J2: "3-pin Terminal Block"
J3: library part CON3, "Connector 3 pin"
J4: library part CON9, "9-pin 0.100\" Female Header"
J5: "CONUFL001-SMD-T"
J6: "Header, 10-Pin, Right Angle"
J8: library part CON12
J11: library part "Coin Cell Holder", "301 30mm Coin Cell Holder"
R1 R2 R3 R4 R5 R6 R7 R8 R9 R10 R11 R12 R13 R14 R15 R16 R17 R18 R19 R20 R21 R22 R23 R24 R25 R26 R27 R28 R29 R30 R31 R32 R33 R34 R35 R36 R37 R38 R39 R40 R41 R42 R44 R45 R46 R47 R48 R49 R50: "Resistor"
S1_BOOT S2_RESET: library part SW-PB, "Switch"
U1: library part ESP32, "Microcontroller"
U2: "QSPI 128M Flash Memory"
U3: library part "USB Shield"
U4: "USB-UART Interface"
U6: "Digital Environmental Sensor"
U7: "GPS Module"
U8 U9: "Quad opamplifiers"
U10 U11 U12 U13 U16: "Linear Regulator 1A"
U15: library part MBT3904DW1, "Dual NPN Transistors"
Y1: "32.768 kHz Crystal"
Y2: library part Y1, "40MHz Crystal Oscillator"

## Free pads (board coordinates)
  round 3.7 hole 3.3: 0(3.937,3.759) 0(4.445,125.044) 0(100.279,125.451) 0(100.381,4.166)

## Via types
v1: diameter 0.6, hole 0.4, Top Layer to Bottom Layer, 195 vias
v2: diameter 1.27, hole 0.711, Top Layer to Bottom Layer, 5 vias
v3: diameter 0.7, hole 0.5, Top Layer to Bottom Layer, 1 vias

## Nets (pads, with @x,y where several pads share a name; then routed paths per layer and width w, separated by ;. In a path a pad name is that pad's centre, name@x,y a point inside that pad or via, vN(x,y) a via of type N, cw(c..) or ccw(c..) an arc to the next point about the centre after c; other vN are vias at no path point)
32K_XN: C15.2 U1.13 Y1.2 | length 14.9
  Top Layer w0.2: U1.13@56.271,45.487 56.271,45.095 54.712,43.536 54.712,40.716 55.728,39.7 59.817,39.7 60.147,39.37 60.147,38.405 59.799,38.056 Y1.2@58.979,38.056 ; C15.2@58.939,36.83 Y1.2@58.939,38.016
32K_XP: C14.2 U1.12 Y1.1 | length 14.2
  Top Layer w0.2: Y1.1@52.679,38.006 50.894,38.006 50.317,38.583 50.317,42.088 54.417,46.187 U1.12@55.571,46.187 ; C14.2@52.719,36.805 Y1.1@52.719,37.966
+3.3V_BME: C22.2 C23.2 C39.1 R44.2 TP17.2 U6.6 U6.8 | length 24.7
  Top Layer w0.3: TP17.2@27.912,103.124 32.371,103.124 32.757,102.738 33.328,102.738 ; U6.6@33.899,102.738 33.328,102.738 ; R44.2@48.26,99.735 46.954,99.735 45.801,98.582 35.231,98.582 33.899,99.914 U6.8@33.899,101.438 33.775,101.438 33.328,101.885 33.328,102.738
+3.3V_GPS: C24.2 C44.2 J4.8 R16.2 TP21.2 U7.7 | length 76.3
  Top Layer w0.2: J4.8@6.172,101.295 8.534,101.295 v1(10.465,99.365) ; v1(27,97.536) 27,95.247 TP21.2@27.962,94.285 TP21.2@27.974,94.274 ; C24.2@30.81,94.274 v1(35.216,94.274) ; U7.7@39.097,82.752 39.097,84.538 39.472,84.912 v1(45.618,84.912) ; v1(50.216,84.861) 52.883,84.861 55.855,87.833 55.855,93.015 56.693,93.853 57.683,93.853 57.974,94.143 R16.2@57.974,95.25
  Top Layer w0.3: TP21.2@27.974,94.274 C44.2@29.464,94.274 C24.2@30.81,94.274
  Power Layer w0.2: v1(10.465,99.365) 11.557,98.273 26.264,98.273 v1(27,97.536) ; v1(35.216,94.274) 36.232,94.274 v1@45.606,84.9 ; v1@45.644,84.861 v1(50.216,84.861)
+3.3V_MCU: C1.2 C2.2 C3.2 C4.2 C5.2 C6.2 C37.1 R4.2 R5.2 R45.2 R46.2 R47.2 R48.2 R49.2 R50.2 TP15.2 TP22.1 TP23.1 U1.3 U1.4 U1.37 U1.43 U1.46 | length 202.7
  Top Layer w0.2: C37.1@29.54,122.747 37.273,122.747 53.365,106.655 70.409,106.655 74.854,102.21 v1(74.854,90.246) ; C2.2@50.459,53.061 50.459,52.44 49.759,51.74 46.304,51.74 45.187,52.857 45.187,59.487 61.9,76.2 61.9,85.954 ; C2.2@50.509,53.01 TP22.1@51.968,53.01 51.968,52.527 52.287,52.208 C3.2@52.287,51.537 53.137,51.537 v1(53.467,51.206) ; C4.2@52.338,49.708 v1(53.543,49.708) 54.102,49.708 54.305,49.505 ; v1(54.356,55.321) 54.827,54.85 C1.2@55.728,54.85 55.728,54 56.058,53.67 v1(56.82,53.67) 56.82,52.984 57.071,52.733 U1.46@57.071,51.287 ; U1.4@55.571,49.387 54.423,49.387 54.305,49.505 ; U1.3@55.571,49.787 54.588,49.787 54.305,49.505 ; U1.43@58.271,51.287 58.271,52.543 58.75,53.022 v1(58.75,53.67) ; C6.2@58.939,41.351 58.953,41.365 TP23.1@58.953,42.469 ; v1(60.452,87.173) 60.452,86.385 60.884,85.954 61.9,85.954 ; v1(60.452,88.976) R4.2@60.452,90.159 ; U1.37@60.671,51.287 60.671,51.959 61.2,52.488 C5.2@62.789,52.488 ; v1(72.06,87.909) 68.467,87.909 68.29,87.732 R5.2@68.123,87.898 68.123,86.258 67.818,85.954 61.9,85.954 ; v1(78.765,102.21) 80.501,103.945 R50.2@82.499,103.945 R49.2@85.039,103.945 R48.2@87.579,103.945 R47.2@90.119,103.945 R46.2@92.659,103.945 R45.2@95.199,103.945
  Top Layer w0.3: TP15.2@27.607,122.733 C37.1@29.526,122.733
  Power Layer w0.2: v1(53.543,49.708) 53.543,49.581 53.569,49.555 53.721,49.708 53.467,49.962 v1(53.467,51.206) 53.467,52.661 53.67,52.864 53.67,54.686 53.696,54.661 v1(54.356,55.321) ; v1(56.82,53.67) v1(58.75,53.67) 59.411,53.67 60.63,52.451 v1(61.189,52.451) 61.189,51.333 61.773,50.749 61.773,43.891 60.35,42.469 TP23.1@58.953,42.469 ; v1(60.452,87.173) v1(60.452,88.976) ; v1(72.06,87.909) 73.203,87.909 74.854,89.56 v1(74.854,90.246) ; v1(74.854,102.159) 78.715,102.159 v1(78.765,102.21)
+3.3V_TEMP: C41.1 J2.2 TP19.2 | length 4
  Top Layer w0.3: TP19.2@27.785,112.903 J2.2@31.826,112.903
+5V: C34.2 TP2.2 U8.4 U9.4 | length 82
  Top Layer w0.2: TP2.2@27.607,55.372 C34.2@29.196,55.372 ; v2(32.08,27.686) v2@32.106,27.686
  Top Layer w0.5: U8.4@16.027,23.642 17.597,23.642 18.618,24.663 v2(18.618,37.262) ; v2(18.644,40.361) 18.644,42.062 21.565,44.983 26.924,44.983 30.861,48.92 30.861,54.686 30.161,55.386 C34.2@29.21,55.386 ; v2@32.106,27.686 34.061,25.73 v2(36.678,25.73) ; v2(38.684,23.724) U9.4@47.93,23.724
  Power Layer w0.2: v2(32.08,27.686) v2@32.08,27.711
  Power Layer w0.5: v2(18.618,37.262) 26.441,37.262 30.937,32.766 30.937,28.854 v2@32.08,27.711 ; v2@18.644,37.287 v2(18.644,40.361) ; v2(36.678,25.73) v2(38.684,23.724)
+VBAT: C33.2 C38.2 C42.2 C45.2 FB1.1 FB3.1 J3.3 TP18.1 U11.3 U16.3 | length 96.9
  Top Layer w0.5: C42.2@11.43,91.962 FB3.1@13.095,91.962 ; TP18.1@11.913,115.519 J3.3@6.223,115.519 ; FB3.1@13.027,92.03 13.027,103.327 ; FB3.1@13.106,91.973 13.106,54.432 14.464,53.075 C33.2@16.434,53.075 U16.3@18.561,53.075 ; FB1.1@13.476,123.788 C45.2@11.405,123.788 10.53,123.788 6.223,119.482 J3.3@6.223,115.519 ; U11.3@18.691,100.849 C38.2@16.789,100.849 15.584,100.849 13.03,103.403 13.03,108.712 J3.3@6.223,115.519
ALPHS0: C25.2 R42.2 U1.14 U8.1 | length 66.9
  Top Layer w0.2: 11.405,34.214 15.748,38.557 16.452,38.557 16.474,38.536 42.244,38.536 v1(42.266,38.557) ; v1(55.677,42.672) 55.728,43.641 56.671,44.584 U1.14@56.671,45.487
  Top Layer w0.3: R42.2@8.625,30.246 8.625,31.714 8.825,31.914 C25.2@8.825,32.786 8.825,33.895 9.144,34.214 11.405,34.214 12.7,32.918 12.7,29.25 14.498,27.452 U8.1@16.027,27.452
  Power Layer w0.2: v1@42.342,38.557 44.577,40.792 51.714,40.792 53.594,42.672 v1(55.677,42.672)
ALPHS1: C26.2 R21.2 U1.15 U8.7 | length 89.5
  Top Layer w0.2: U8.7@16.027,19.832 17.419,19.832 19.812,22.225 19.812,34.569 23.114,37.871 v1(42.977,37.871) ; v1(56.413,42.062) 56.413,43.459 57.071,44.117 U1.15@57.071,45.487
  Top Layer w0.3: C26.2@8.825,22.626 8.825,21.804 8.625,21.604 R21.2@8.625,20.086 6.37,20.086 5.588,19.304 5.588,13.614 6.731,12.471 v1(12.725,12.471) ; v1(16.027,15.824) U8.7@16.027,19.832
  Power Layer w0.2: v1(42.977,37.871) 45.548,40.442 51.859,40.442 53.479,42.062 v1(56.413,42.062)
  Power Layer w0.3: v1(12.725,12.471) 14.453,12.471 16.027,14.046 v1(16.027,15.824)
ALPHS2: C27.2 R24.2 U1.16 U8.8 | length 66
  Top Layer w0.2: C27.2@28.905,22.403 28.905,20.063 R24.2@29.105,19.863 ; v1(57.252,41.3) 57.252,42.215 57.471,42.434 U1.16@57.471,45.487
  Top Layer w0.3: v1(22.123,18.034) U8.8@22.123,19.832 ; R24.2@29.105,19.863 30.531,19.863 ; v1(30.988,18.339) 30.988,19.406 30.531,19.863 ; v1(32.512,21.209) 31.166,19.863 30.531,19.863
  Power Layer w0.2: v1(32.512,21.209) 33.68,22.377 33.68,33.096 37.389,36.805 43.18,36.805 46.468,40.092 52.004,40.092 52.724,40.812 56.763,40.812 v1(57.252,41.3)
  Power Layer w0.3: v1(22.123,18.034) 22.123,16.84 22.885,16.078 30.404,16.078 30.988,16.662 v1(30.988,18.339)
ALPHS3: C28.2 R27.2 U1.17 U8.14 | length 64
  Top Layer w0.2: R27.2@29.105,30.023 31.801,30.023 35.738,33.96 v1(38.583,33.96) ; U1.17@57.871,45.487 57.871,40.732 58.402,40.201 60.256,40.201 63.322,37.135 v1(63.322,36.398)
  Top Layer w0.3: U8.14@22.123,27.452 23.794,27.452 24.714,28.372 24.714,31.699 26.695,33.68 28.727,33.68 28.905,33.503 C28.2@28.905,32.563 R27.2@28.905,30.223
  Power Layer w0.2: v1(38.583,33.96) 60.884,33.96 v1(63.322,36.398)
ALPHS4: C29.2 R30.2 U1.18 U9.1 | length 71
  Top Layer w0.2: v1(37.719,26.822) 36.373,26.822 35.763,27.432 35.763,29.108 36.704,30.049 R30.2@40.4,30.049 ; U1.18@58.271,45.487 58.271,43.355 58.547,43.078 60.833,43.078 64.313,39.599 v1@64.313,35.662
  Top Layer w0.3: R30.2@40.4,30.049 40.4,31.485 40.6,31.685 C29.2@40.6,32.589 40.6,34.073 41.554,35.027 45.923,35.027 47.93,33.02 U9.1@47.93,27.534
  Power Layer w0.2: v1(37.719,26.822) 55.524,26.822 v1(64.338,35.636)
ALPHS5: C30.2 R33.2 U1.20 U9.7 | length 72
  Top Layer w0.2: U1.20@59.071,45.487 59.071,44.523 59.303,44.29 59.303,44.278 60.071,43.51 61.519,43.51 65.786,39.243 v1(65.786,37.211)
  Top Layer w0.3: C30.2@40.6,22.429 40.6,21.5 40.4,21.3 R33.2@40.4,19.889 39.523,19.889 38.405,18.771 38.405,13.36 39.37,12.395 v1(40.996,12.395) ; v1(47.93,15.113) U9.7@47.93,19.914
  Power Layer w0.2: v1(47.93,15.113) 53.873,15.113 65.786,27.026 v1(65.786,37.211)
  Power Layer w0.3: v1(40.996,12.395) 46.457,12.395 47.93,13.868 v1(47.93,15.113)
ALPHS6: C31.2 R36.2 U1.24 U9.8 | length 63.5
  Top Layer w0.2: U1.24@60.671,45.487 60.671,44.765 60.875,44.56 66.555,44.56 68.215,42.901 68.215,36.687 v1(68.25,36.652) ; R36.2@61.863,19.886 C31.2@61.863,22.226 66.549,22.226 68.25,23.927 v1(68.25,25.273)
  Top Layer w0.3: U9.8@54.026,19.914 54.026,13.716 55.524,12.217 63.043,12.217 64.668,13.843 64.668,18.796 63.779,19.686 R36.2@62.063,19.686
  Power Layer w0.2: v1(68.25,25.273) v1(68.25,36.652)
ALPHS7: C32.2 R39.2 U1.35 U9.14 | length 40.7
  Top Layer w0.2: U1.35@61.371,50.187 62.264,50.187 62.496,50.419 v1(63.119,50.419) ; R39.2@61.863,30.249 C32.2@61.863,32.589 ; C32.2@61.913,32.639 v1(64.008,32.639)
  Top Layer w0.3: U9.14@54.026,27.534 54.026,32.309 55.855,34.138 61.366,34.138 61.863,33.641 C32.2@61.863,32.589
  Power Layer w0.2: v1(63.119,50.419) 63.119,49.174 62.586,48.641 62.586,39.522 65.024,37.084 65.024,33.096 64.567,32.639 v1(64.008,32.639)
CAP1: C8.2 C9.2 R1.1 U1.48 | length 11.2
  Top Layer w0.2: C9.2@50.459,54.381 C8.2@50.459,55.778 50.419,55.818 50.419,56.667 50.633,56.882 R1.1@50.633,58.09 ; C9.2@50.484,54.356 53.575,54.356 53.844,54.086 54.016,54.086 56.271,51.832 U1.48@56.271,51.287
CAP2: C8.1 R1.2 U1.47 | length 17.1
  Top Layer w0.2: C8.1@49.059,55.778 49.059,56.682 48.833,56.907 R1.2@48.833,58.09 48.833,59.146 49.403,59.715 51.283,59.715 51.994,59.004 51.994,56.432 53.989,54.436 54.428,54.436 56.671,52.194 U1.47@56.671,51.287
CHIP_PU: R4.1 S2_RESET.2 U1.9 U15.3 | length 71.8
  Top Layer w0.2: v1(42.926,46.761) 41.707,46.761 40.767,47.701 40.767,61.908 S2_RESET.2@59.233,80.374 ; v1(45.822,46.761) 45.833,46.773 53.237,46.773 53.851,47.387 U1.9@55.571,47.387 ; R4.1@60.452,91.959 U15.3@62.831,91.959
  Top Layer w0.3: v1(58.395,89.611) 58.395,91.288 59.066,91.959 R4.1@60.452,91.959 ; S2_RESET.2@59.233,80.374 v1(59.233,85.319)
  Power Layer w0.2: v1(42.926,46.761) v1(45.822,46.761)
  Power Layer w0.3: v1(58.395,89.611) 58.395,86.233 59.284,85.344 59.258,85.319 v1(59.233,85.319)
DIFF90_N: C18.2 D2.2 R7.1 U3.2 | length 4.7
  Top Layer w0.2: C18.2@68.758,119.956 C18.2@68.766,119.964
  Top Layer w0.4: U3.2@68.387,123.292 68.387,121.912 68.512,121.787 D2.2@68.512,121.437 68.512,120.44 68.537,120.414 C18.2@68.537,119.964 68.537,119.478 68.758,119.258 R7.1@68.758,118.708
DIFF90_P: C19.2 D3.2 R8.1 U3.3 | length 4.7
  Top Layer w0.2: C19.2@67.48,119.964 C19.2@67.488,119.956
  Top Layer w0.4: R8.1@67.488,118.708 67.488,119.258 67.632,119.402 C19.2@67.632,119.964 67.632,120.414 67.658,120.44 D3.2@67.658,121.437 67.658,121.787 67.737,121.867 U3.3@67.737,123.292
EXT_TEMP: J2.3 U1.10 | length 82.8
  Top Layer w0.2: v1(31.75,104.927) 31.75,107.827 J2.3@31.852,107.928 ; v1(31.775,64.694) 31.775,53.975 41.25,44.501 v1(43.358,44.501) ; v1(45.949,44.501) 51.537,44.501 54.023,46.987 U1.10@55.571,46.987
  Power Layer w0.2: v1(31.75,104.927) 31.775,104.927 v1(31.775,64.694) ; v1(43.358,44.501) v1(45.949,44.501)